# Altium PCB ChildBoardV1.PcbDoc
Units mm, origin at the board's own origin, x right, y up, seen from the top; angles counter-clockwise.
Board outline 11.68 x 16.51 mm, 2 copper layers (Top Layer, Bottom Layer); 5 components, 4 nets, 24 pads, 8 vias.
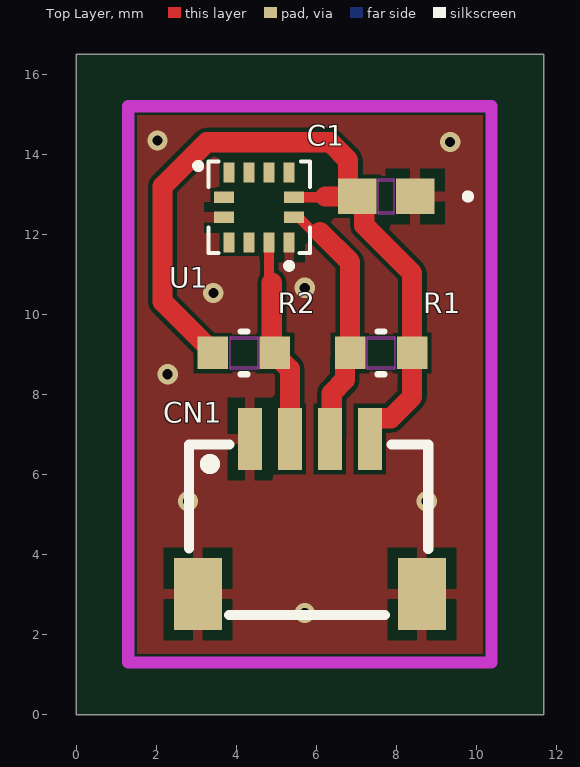
[diagram p0: Top Layer view]
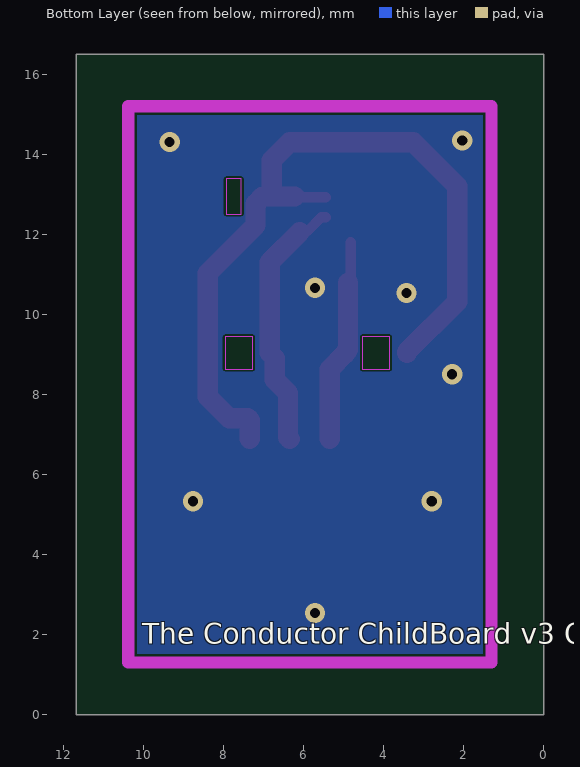
[diagram p1: Bottom Layer view, seen from below]
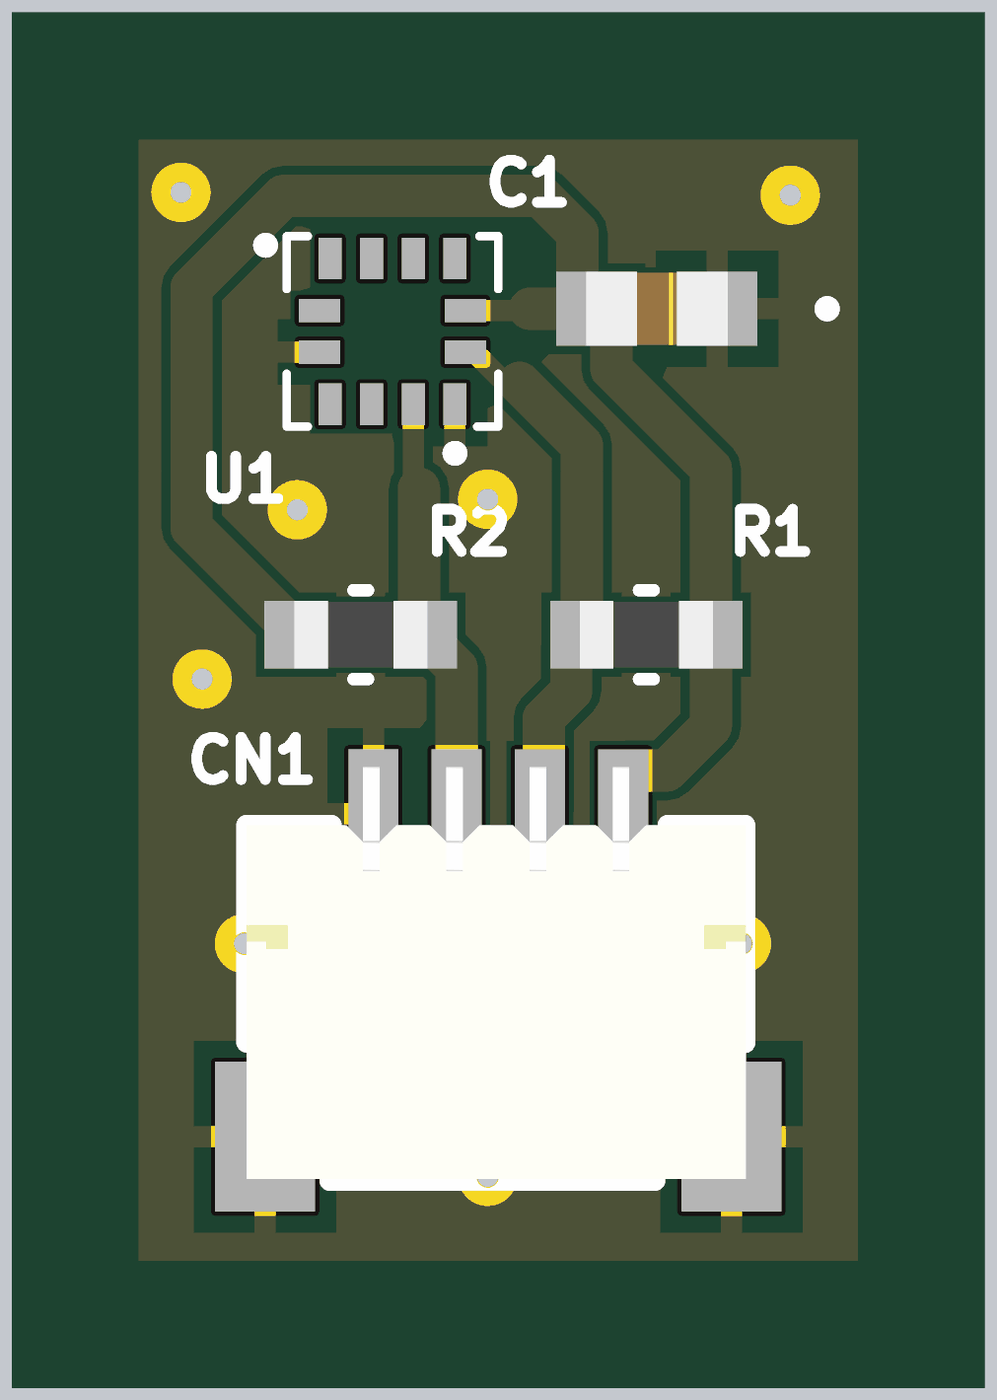
[diagram p2: 3D render of the assembled board from above, using the file's embedded part models]

## Layer stack, top to bottom
Top Solder: solder mask 0.0102, Solder Resist, Dk 3.5
Top Layer: signal copper 0.0356
Dielectric 1: dielectric 0.32, FR-4, Dk 4.8
Bottom Layer: signal copper 0.0356
Bottom Solder: solder mask 0.0102, Solder Resist, Dk 3.5

## Board outline
0,0 11.684,0 11.684,16.51 0,16.51

## Design rules (kind name [scope] priority, off if disabled: settings)
Clearance Clearance_KeepOut [IsKeepOut] p1: gap=0.051 ignorepadtopadclearanceinfootprint=FALSE
Clearance [All] p2: gap=0.102 ignorepadtopadclearanceinfootprint=FALSE
MinimumSolderMaskSliver [All] p1: minsoldermaskwidth=0.003
PolygonConnect via [InNet('GND') vs IsVia] p1: connectstyle=Direct reliefconductorwidth=0.254 reliefentries=4 polygonreliefangle="90 Angle" airgapwidth=0.254
PolygonConnect [All] p2: connectstyle=Relief reliefconductorwidth=0.254 reliefentries=4 polygonreliefangle="90 Angle" airgapwidth=0.254
RoutingVias [All] p1: holewidth=0.635 width=1.27 viastyle="Through Hole" minholewidth=0.635 minwidth=1.27 maxholewidth=0.635 maxwidth=1.27
SilkToSolderMaskClearance [IsPad] p1: minsilkscreentomaskgap=0.003 clearancetoexposedcopper=TRUE
SolderMaskExpansion [All] p1: expansion=0.102 istentingtop=FALSE
Width [All] p1: maxlimit=0.508 minlimit=0.254 preferedwidth=0.254 minimp=50.000000 maximp=50.000000 favimp=50.000000
28 further rules are at their usual default settings.

## Components (designator, comment, footprint, x,y, rotation, side; value= is the part's Value field where it differs from the comment)
C1 "0.1 uF" CAP_AMK107BJ475MK-T_TAY 7.747,12.954 r180 top
CN1 "4 pin connector" CONN-SMD_4P-P1.00_SM04B-SRSS-TB-LF-SN 5.842,4.953 r0 top
R1 "4.7K" RC0603N_YAG 7.62,9.042 r180 top
R2 "4.7K" RC0603N_YAG 4.191,9.042 r0 top
U1 "MC3416-P" LGA-12_L2.0-W2.0-P0.50-BL 4.572,12.7 r180 top

## Footprints (in the part's own frame and the unit in brackets; to place one, negate y for a bottom-side part, rotate by r counter-clockwise, add the part's x,y. Pads: shape width x height; smd on the part's side, far side on the other; paste and mask are expansions set on the pad)
CAP_AMK107BJ475MK-T_TAY [mil]
  rect 38x35 smd paste+0 mask+0: 1(-28.5,0) 2(28.5,0)
  Top Layer keep-out region: -7.5,-15.5 -7.5,15.5 7.5,15.5 7.5,-15.5
  Keep-Out Layer region: -7.5,-17.5 -7.5,17.5 7.5,17.5 7.5,-17.5
  silkscreen extent -84,-3 -78,3, body extent -34,-17 34,17, height 20
CONN-SMD_4P-P1.00_SM04B-SRSS-TB-LF-SN [mm]
  rect 0.6x1.55 smd paste+0 mask+0.051: 1(-1.5,1.938) 2(-0.5,1.938) 3(0.501,1.938) 4(1.5,1.938)
  rect 1.2x1.8 smd paste+0 mask+0.051: 5(2.8,-1.938) 6(-2.8,-1.938)
  silkscreen extent -3.02,-2.46 2.96,1.8, body extent -3.03,-2.45 2.97,2.5, height 3.28
LGA-12_L2.0-W2.0-P0.50-BL [mm]
  rect 0.28x0.5 smd paste+0 mask+0.051: 1(-0.75,0.892) 4(-0.75,-0.858) 5(-0.25,-0.858) 6(0.25,-0.858) 7(0.75,-0.858) 10(0.75,0.892) 11(0.25,0.892) 12(-0.25,0.892)
  rect 0.5x0.28 smd paste+0 mask+0.051: 2(-0.875,0.267) 3(-0.875,-0.233) 8(0.875,-0.233) 9(0.875,0.267)
  silkscreen extent -1.27,-1.13 1.6,1.56
RC0603N_YAG [mil]
  rect 30x32 smd paste+0 mask+0: 1(-30.5,0) 2(30.5,0)
  Top Layer keep-out region: -13.5,-14 -13.5,14 13.5,14 13.5,-14
  Keep-Out Layer region: -13.5,-16 -13.5,16 13.5,16 13.5,-16
  silkscreen extent -3,-21 3,21, body extent -31,-16 31,16, height 28

## Part data
C1: "SMT Capacitor 0.1 uF", LCSC PART #=C1591, Manufacturer_Part_Number=AMK107BJ475MK-T, Mfr_Name="Taiyo Yuden", Copyright="Copyright (C) 2023 Ultra Librarian. All rights reserved.", Digi-Key_Part_Number_1=587-2228-1-ND, Digi-Key_Part_Number_2=587-2228-2-ND, Digi-Key_Part_Number_3=587-2228-6-ND, RefDes=RefDes, Type=DEV
CN1: JLCPCB Part Class="Extended Part", LCSC PART #=C160404, Manufacturer=JST, Manufacturer Part=SM04B-SRSS-TB(LF)(SN), Contributor=LCSC, spicePre=C, spiceSymbolName="SM04B-SRSS-TB (LF)(SN)", Supplier=LCSC, Supplier Part=C160404
R1 R2: "SMT Resitor 4.7k", LCSC PART #=C105428, Manufacturer_Part_Number=RC0603JR-072K7L, Mfr_Name=Yageo, Copyright="Copyright (C) 2023 Ultra Librarian. All rights reserved.", Digi-Key_Part_Number_1=311-2.7KGRCT-ND, Digi-Key_Part_Number_2=311-2.7KGRDKR-ND, Digi-Key_Part_Number_3=311-2.7KGRTR-ND, Digi-Key_Part_Number_4=311-2.7KGRTR-NDL, RefDes=RefDes, Type=DEV
U1: "VLGA-12 Attitude Sensor/Gyroscope ROHS", LCSC PART #=C5250287

## Via types
v1: diameter 0.508, hole 0.254, Top Layer to Bottom Layer, 8 vias

## Nets (pads, with @x,y where several pads share a name; then routed paths per layer and width w, separated by ;. In a path a pad name is that pad's centre, name@x,y a point inside that pad or via, vN(x,y) a via of type N, cw(c..) or ccw(c..) an arc to the next point about the centre after c; other vN are vias at no path point)
+3.3V: C1.2 CN1.4 R1.1 R2.1 U1.3 | length 19.6
  Top Layer w0.254: U1.3 6.202,12.933 6.223,12.954
  Top Layer w0.508: R2.1 3.416,9.068 2.159,10.325 2.159,13.208 3.258,14.307 6.35,14.307 6.794,13.863 C1.2@6.794,13.144 ; 6.223,12.954 C1.2 7.201,12.776 7.201,12.23 8.395,11.036 R1.1 8.395,7.943 7.863,7.412 7.388,7.412 7.342,7.366 CN1.4
GND: C1.1 CN1.1 CN1.5 CN1.6 U1.1 U1.9
  other v1: 5.715,2.54 2.794,5.334 8.763,5.334 2.286,8.509 3.429,10.541 5.715,10.668 9.348,14.317 2.032,14.351
SC: CN1.2 R2.2 U1.12 | length 5.1
  Top Layer w0.254: U1.12 4.822,10.862 4.889,10.795
  Top Layer w0.508: 4.889,10.795 4.889,9.119 R2.2 4.966,9.017 5.342,8.64 CN1.2
SD: CN1.3 R1.2 U1.2 | length 6.5
  Top Layer w0.254: U1.2 5.557,12.433 5.925,12.065 6.096,12.065
  Top Layer w0.508: 6.096,12.065 6.845,11.316 R1.2 6.718,8.915 6.718,8.369 6.389,8.04 6.389,6.937 CN1.3
pads on no net: U1.4 U1.5 U1.6 U1.7 U1.8 U1.10 U1.11

## Polygon pours and split planes (outlines as drawn)
GND on Bottom Layer "GND_L02_P002" (solid, pour order 2): 1.524,14.986 1.524,1.524 10.16,1.524 10.16,14.986
GND on Top Layer "GND_L01_P000" (solid, pour order 0): 1.524,14.986 10.16,14.986 10.16,1.524 1.524,1.524

## Keep-outs
Keep-Out Layer:
  lines w0.305: 1.3,1.3 1.3,15.21 10.384,15.21 10.384,1.3 1.3,1.3

## Silkscreen, mask and mechanical layers (free items; w line width, h text height)
Bottom Overlay:
  text "The Conductor ChildBoard v3 Oct2023" at 10.033,1.778 h0.51